# Altium PCB PCB4.PcbDoc (part 2 of 5)
Units mm, origin at the board's own origin, x right, y up, seen from the top; angles counter-clockwise.
Board outline 240 x 180 mm, 2 copper layers (Top Layer, Bottom Layer); 259 components, 311 nets, 1128 pads, 419 vias.
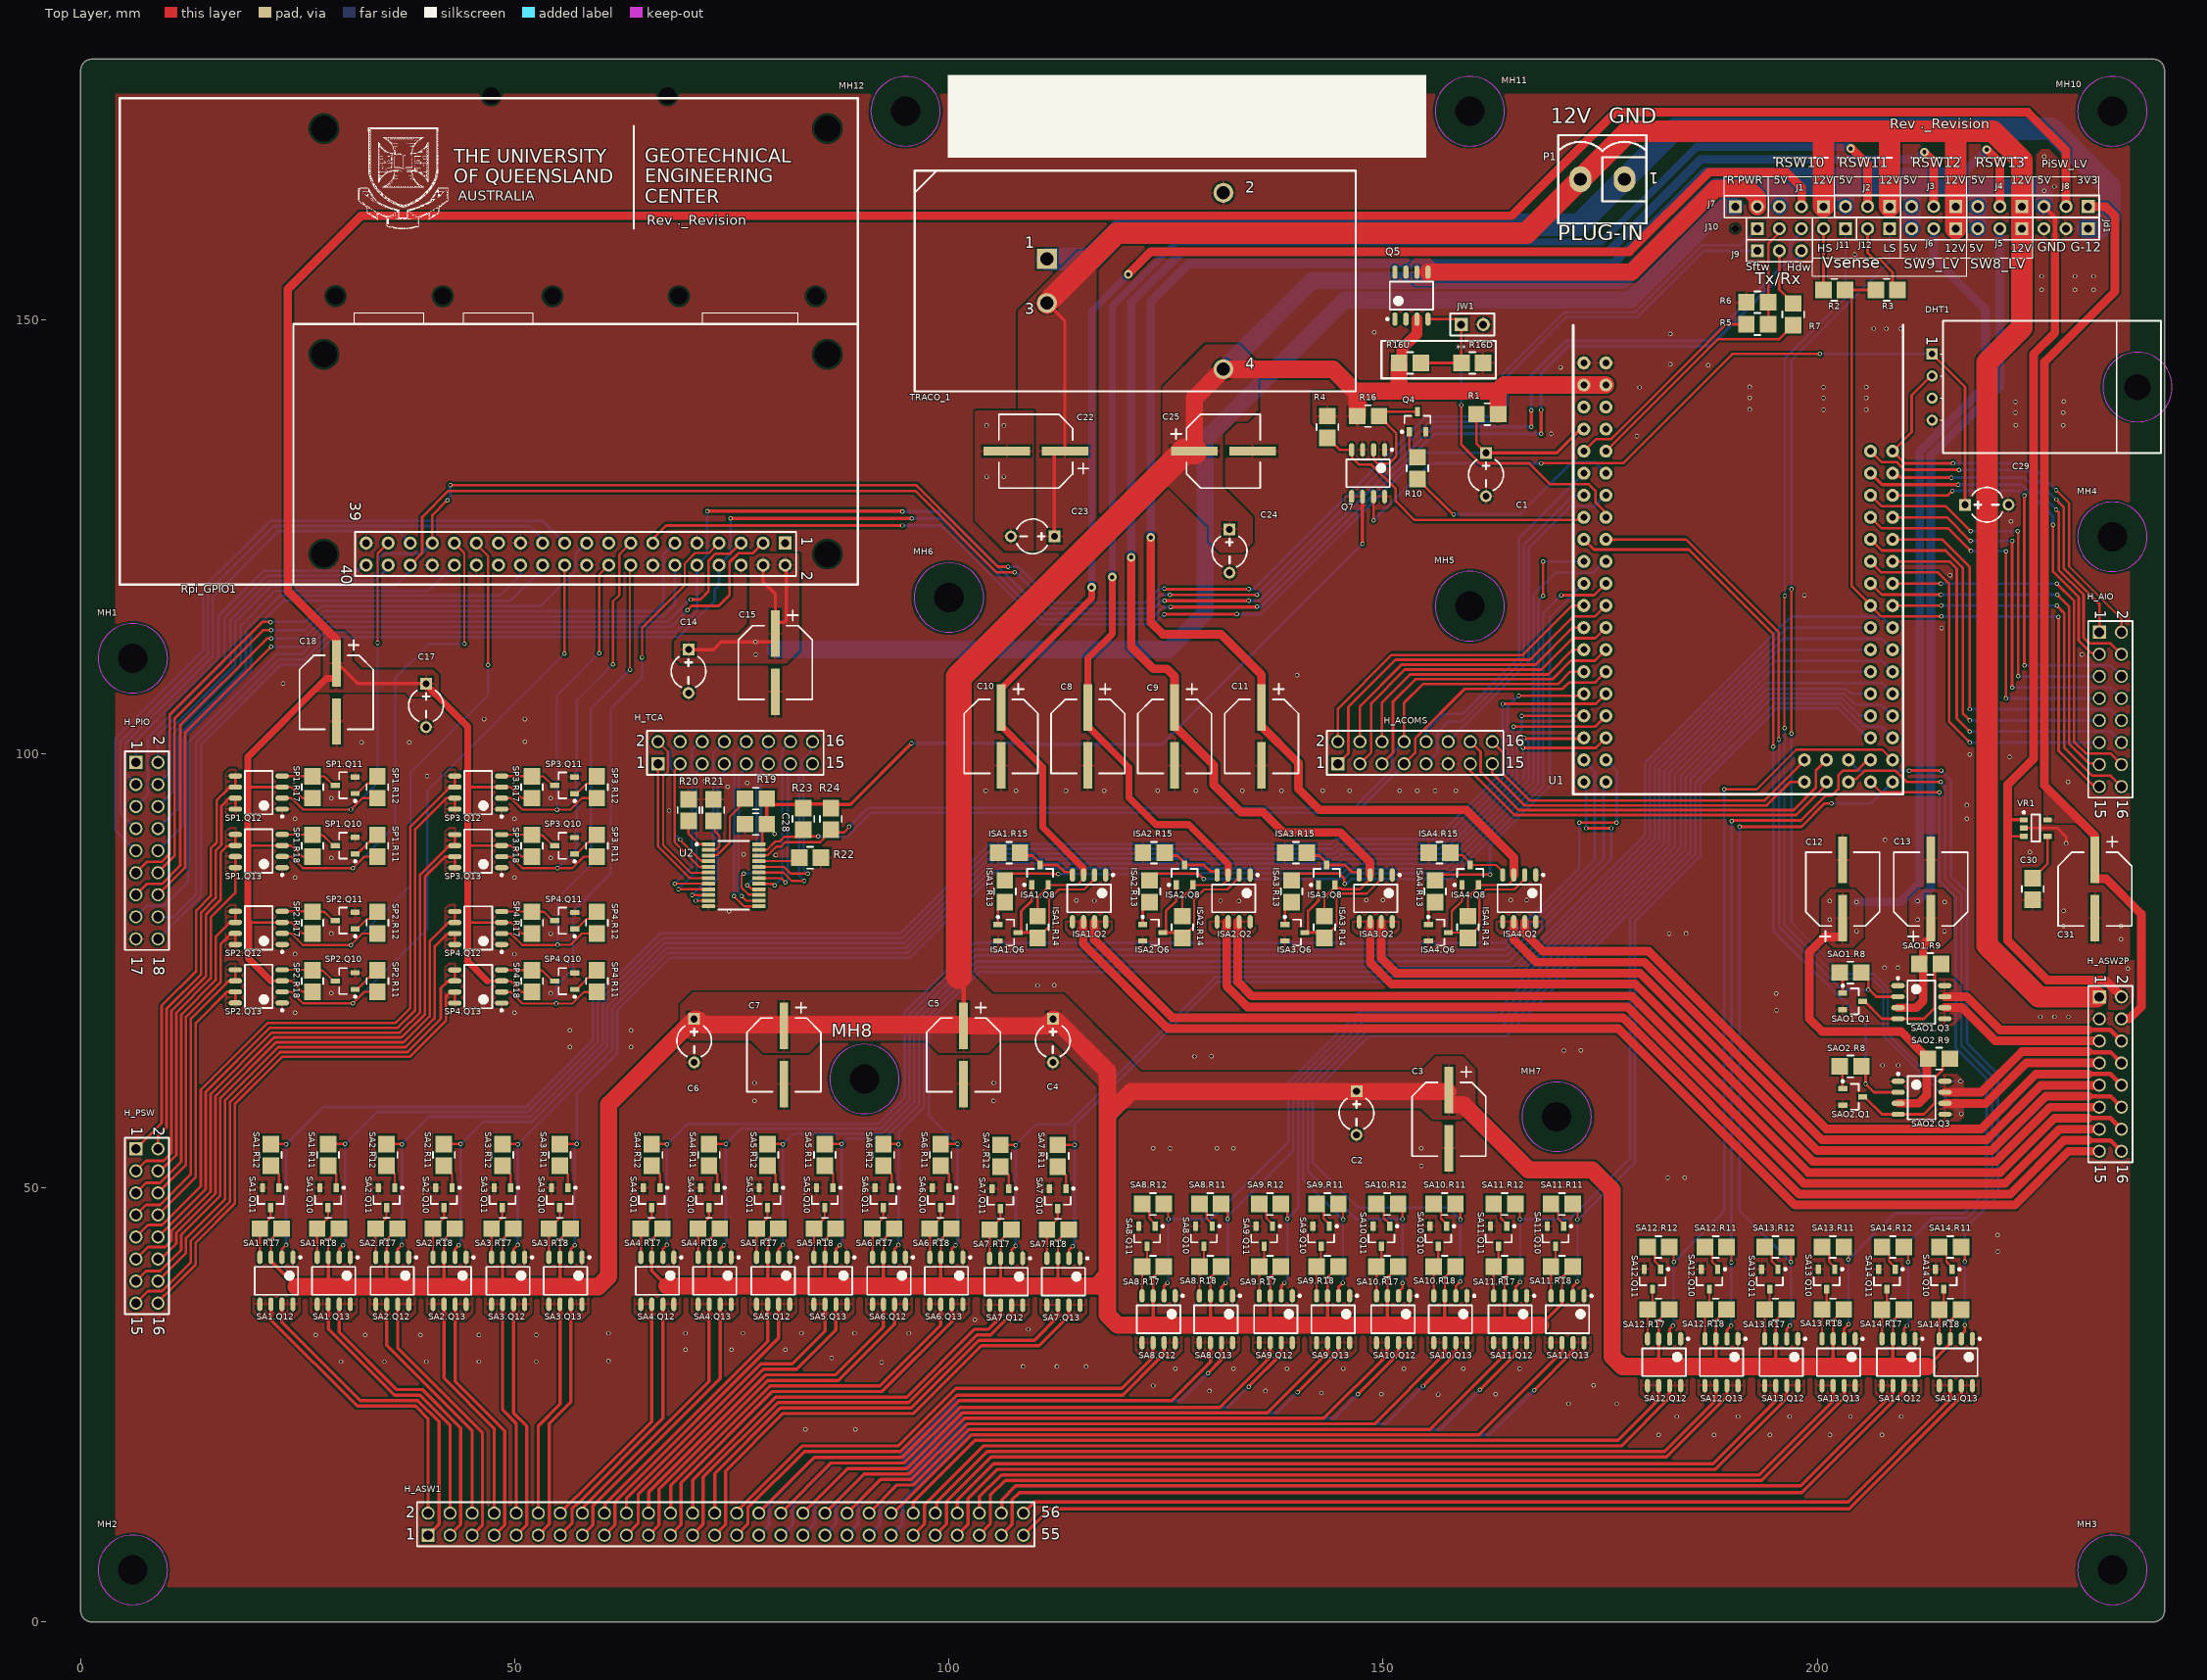
[diagram p0: Top Layer view]

## Free pads (board coordinates) (continued)
  round 1.5 hole 0.8: 3V3@1(173.126,139.93) 3V3@2(175.666,139.93) A0/D54(208.686,134.85) A1/D55(206.146,134.85) A2/D56(208.686,132.31) A3/D57(206.146,132.31) A4/D58(208.686,129.77) A5/D59(206.146,129.77) A6/D60(208.686,127.23) A7/D61(206.146,127.23) A8/D62(208.686,124.69) A9/D63(206.146,124.69) A10/D64(208.686,122.15) A11/D65(206.146,122.15) A12/D66(208.686,119.61) A13/D67(206.146,119.61) A14/D68(208.686,117.07) A15/D69(206.146,117.07) AREF(175.666,137.39) D0(175.666,134.85) D1(173.126,134.85) D2(175.666,132.31) D3(173.126,132.31) D4(175.666,129.77) D5(173.126,129.77) D6(175.666,127.23) D7(173.126,127.23) D8(175.666,124.69) D9(173.126,124.69) D10(175.666,122.15) D11(173.126,122.15) D12(175.666,119.61) D13(173.126,119.61) D14(175.666,117.07) D15(173.126,117.07) D16(175.666,114.53) D17(173.126,114.53) D18(175.666,111.99) D19(173.126,111.99) D20(175.666,109.45) D21(173.126,109.45) D22(175.666,106.91) D23(173.126,106.91) D24(175.666,104.37) D25(173.126,104.37) D26(175.666,101.83) D27(173.126,101.83) D28(175.666,99.29) D29(173.126,99.29) D30(175.666,96.75) D31(173.126,96.75) D32(208.686,114.53) D33(206.146,114.53) D34(208.686,111.99) D35(206.146,111.99) D36(208.686,109.45) D37(206.146,109.45) D38(208.686,106.91) D39(206.146,106.91) D40(208.686,104.37) D41(206.146,104.37) D42(208.686,101.83) D43(206.146,101.83) D44(208.686,99.29) D45(206.146,99.29) D46(208.686,96.75) D47(206.146,96.75) D48(203.606,96.75) D49(203.606,99.29) D50(201.066,96.75) D51(201.066,99.29) D52(198.526,96.75) D53(198.526,99.29) GND@1(173.126,145.01) GND@2(175.666,145.01) RST@1(173.126,137.39) VCC@1(173.126,142.47) VCC@2(175.666,142.47)

## Via types
v1: diameter 0.5, hole 0.3, Top Layer to Bottom Layer, 387 vias
v2: diameter 0.5, hole 0.3, Top Layer to Bottom Layer, tented both sides, 24 vias
v3: diameter 1, hole 0.5, Top Layer to Bottom Layer, 8 vias